# EAGLE board IRIDIUM (EAGLE 9.3.0)
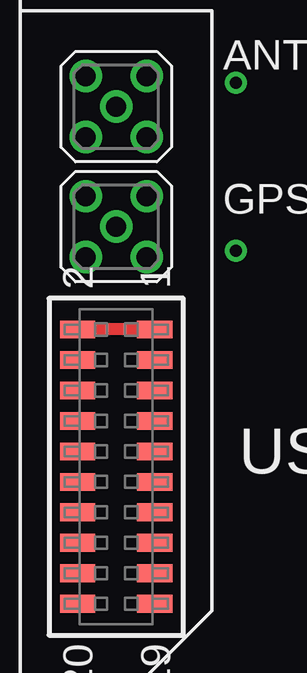
[diagram p0: board, top side]

No outline drawn. Coordinates in mm, seen from the top.
Copper layers (1*16): Top 0.035mm / dielectric 1.5mm / Bottom 0.035mm
Design rules "default": minimum track width 6mil, minimum drill 0.35mm, track to track 6mil, track to pad 6mil, pad to pad 6mil, via to via 6mil, smd to smd 6mil, copper to edge 40mil, drill to drill 6mil, minimum pad ring 10mil, minimum via ring 8mil, stop-mask expansion 4mil, vias tented up to drill 0mil, thermal gap 10mil
Net classes: 0 default: width 0.2 mm, clearance 0.2 mm; 1 power: width 0.5 mm, clearance 0.2 mm; 2 rf: width 0.5 mm, clearance 0.065 mm
Holes 3.2 mm at 31.43,24.78 66.43,63.78

## Footprints (pad centres in the part's own frame; a part is rotated, then mirrored left to right if it is on the bottom)
MMCX-P-P-X-ST-TH1 = drill 0.84 pad 1.3: 1 0,0; 2 -1.27,1.27; 3 -1.27,-1.27; 4 1.27,1.27; 5 1.27,-1.27
SAMTEC-CLP-110-02-X-D = smd 0.74 x 1.47: 1 -5.715,1.613; 2 -5.715,-1.613; 3 -4.445,1.613; 4 -4.445,-1.613; 5 -3.175,1.613; 6 -3.175,-1.613; 7 -1.905,1.613; 8 -1.905,-1.613; 9 -0.635,1.613; 10 -0.635,-1.613; 11 0.635,1.613; 12 0.635,-1.613; 13 1.905,1.613; 14 1.905,-1.613; 15 3.175,1.613; 16 3.175,-1.613; 17 4.445,1.613; 18 4.445,-1.613; 19 5.715,1.613; 20 5.715,-1.613

## Placement (x,y rotation side)
ANT  MMCX-P-P-X-ST-TH1  [MMCX-P-P-X-ST-TH1]  32.43,54.78 0 top
GPS  MMCX-P-P-X-ST-TH1  [MMCX-P-P-X-ST-TH1]  32.43,49.78 0 top
USER_PORT  SAMTEC-CLP-110-02-X-DJ  [SAMTEC-CLP-110-02-X-D]  32.43,39.78 270 top

## Library data of the parts
ANT GPS = MMCX-P-P-X-ST-TH1; DESCRIPTION: Conn MMCX PL 0Hz to 6GHz 50Ohm Solder ST Thru-Hole Gold Over Nickel; DIGI-KEY_PART_NUMBER: SAM10618-ND; DIGI-KEY_PURCHASE_URL: https://www.digikey.ru/product-detail/en/samtec-inc/MMCX-P-P-H-ST-TH1/SAM10618-ND/6561612?utm_source=snapeda&utm_medium=aggregator&utm_campaign=symbol; MF: Samtec Inc.; MP: MMCX-P-P-H-ST-TH1; PACKAGE: None
USER_PORT = SAMTEC-CLP-110-02-X-D; DESCRIPTION: .050 Tiger Claw™ Rugged Reliable Dual Wipe Socket Strip; DIGI-KEY_PART_NUMBER: CLP-110-02-L-D-K-ND; DIGI-KEY_PURCHASE_URL: https://www.digikey.ru/product-detail/en/samtec-inc/CLP-110-02-L-D-K/CLP-110-02-L-D-K-ND/6693709?utm_source=snapeda&utm_medium=aggregator&utm_campaign=symbol; MF: Samtec Inc.; MP: CLP-110-02-L-D-K; PACKAGE: None

## Nets
GND [power]: ANT.2 ANT.3 ANT.4 ANT.5 GPS.2 GPS.3 GPS.4 GPS.5 USER_PORT.3 USER_PORT.4 USER_PORT.8 USER_PORT.15 USER_PORT.18
RESERVED_1: USER_PORT.16
RESERVED_2\: USER_PORT.17
S$1: USER_PORT.7
S$2: USER_PORT.5
S$3: USER_PORT.9
S$4: USER_PORT.11
S$5: USER_PORT.13
VCC5 [power]: USER_PORT.1 USER_PORT.2

## Tracks (layer width: path | path; a pad name or v marks a point on that pad's centre or on a via)
GND  (via drill 0.5)
  other vias: 37.43,48.78 37.43,55.78
S$1
  Top 0.254: USER_PORT.7 34.07,41.66 34.43,41.66
S$2
  Top 0.254: USER_PORT.5 34.12,43.03 34.33,43.03
S$3
  Top 0.254: USER_PORT.9 34.09,40.41 34.17,40.49 34.33,40.49
S$4
  Top 0.254: USER_PORT.11 34.07,39.12 34.43,39.12
S$5
  Top 0.254: USER_PORT.13 34.07,37.85 34.43,37.85
VCC5
  Top 0.5: USER_PORT.1 USER_PORT.2